# Altium PCB PanQHDMI.PcbDoc
Units mm, origin at the board's own origin, x right, y up, seen from the top; angles counter-clockwise.
Board outline 41.06 x 35.18 mm, 4 copper layers (Top Layer, Layer 1, Layer 2, Bottom Layer); 25 components, 46 nets, 206 pads, 77 vias.
Unrouted connection lines stored in the file: 2.
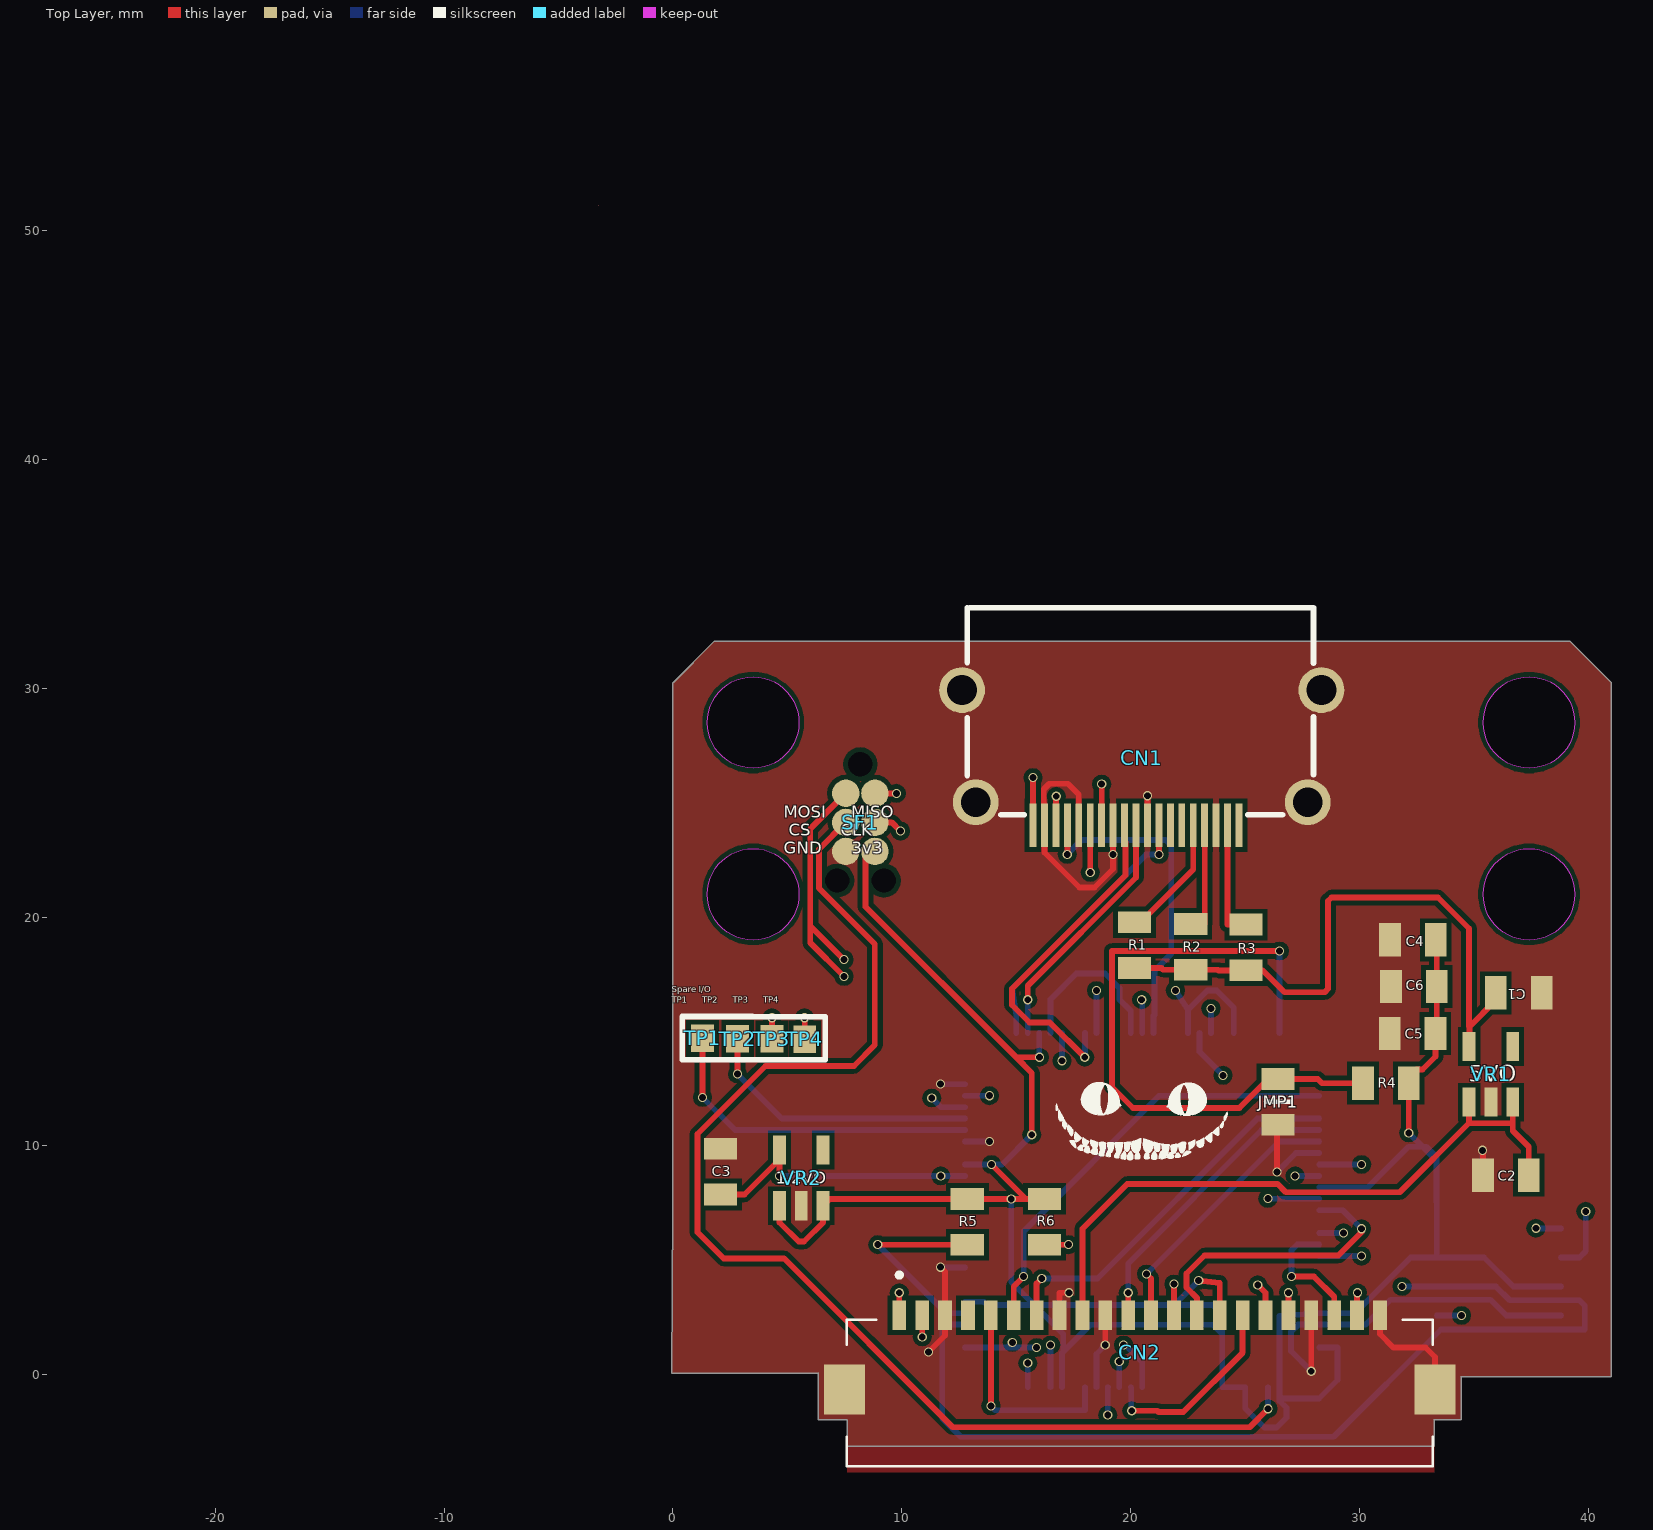
[diagram p0: Top Layer view]
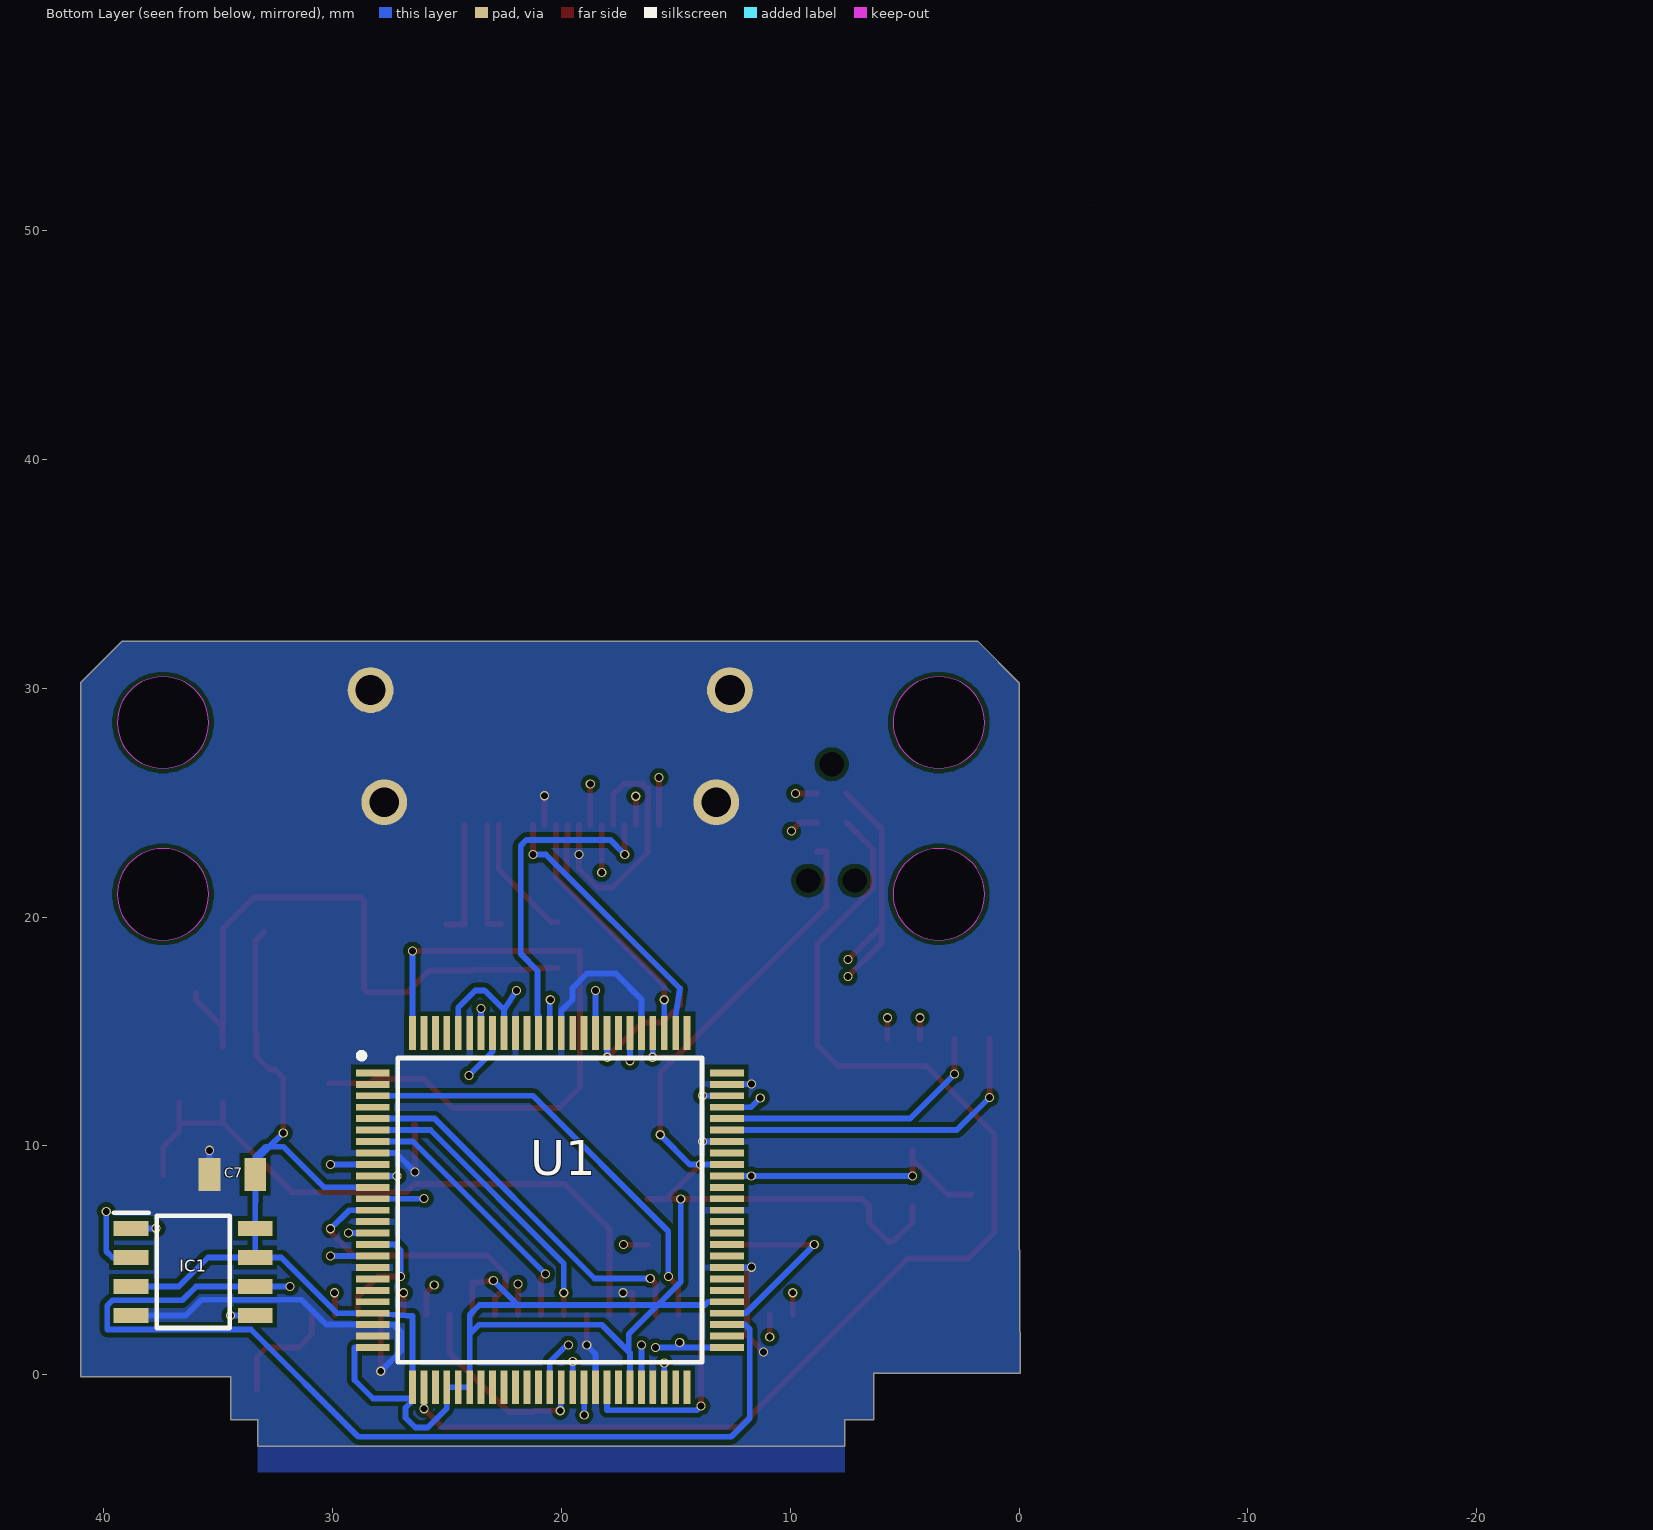
[diagram p1: Bottom Layer view, seen from below]
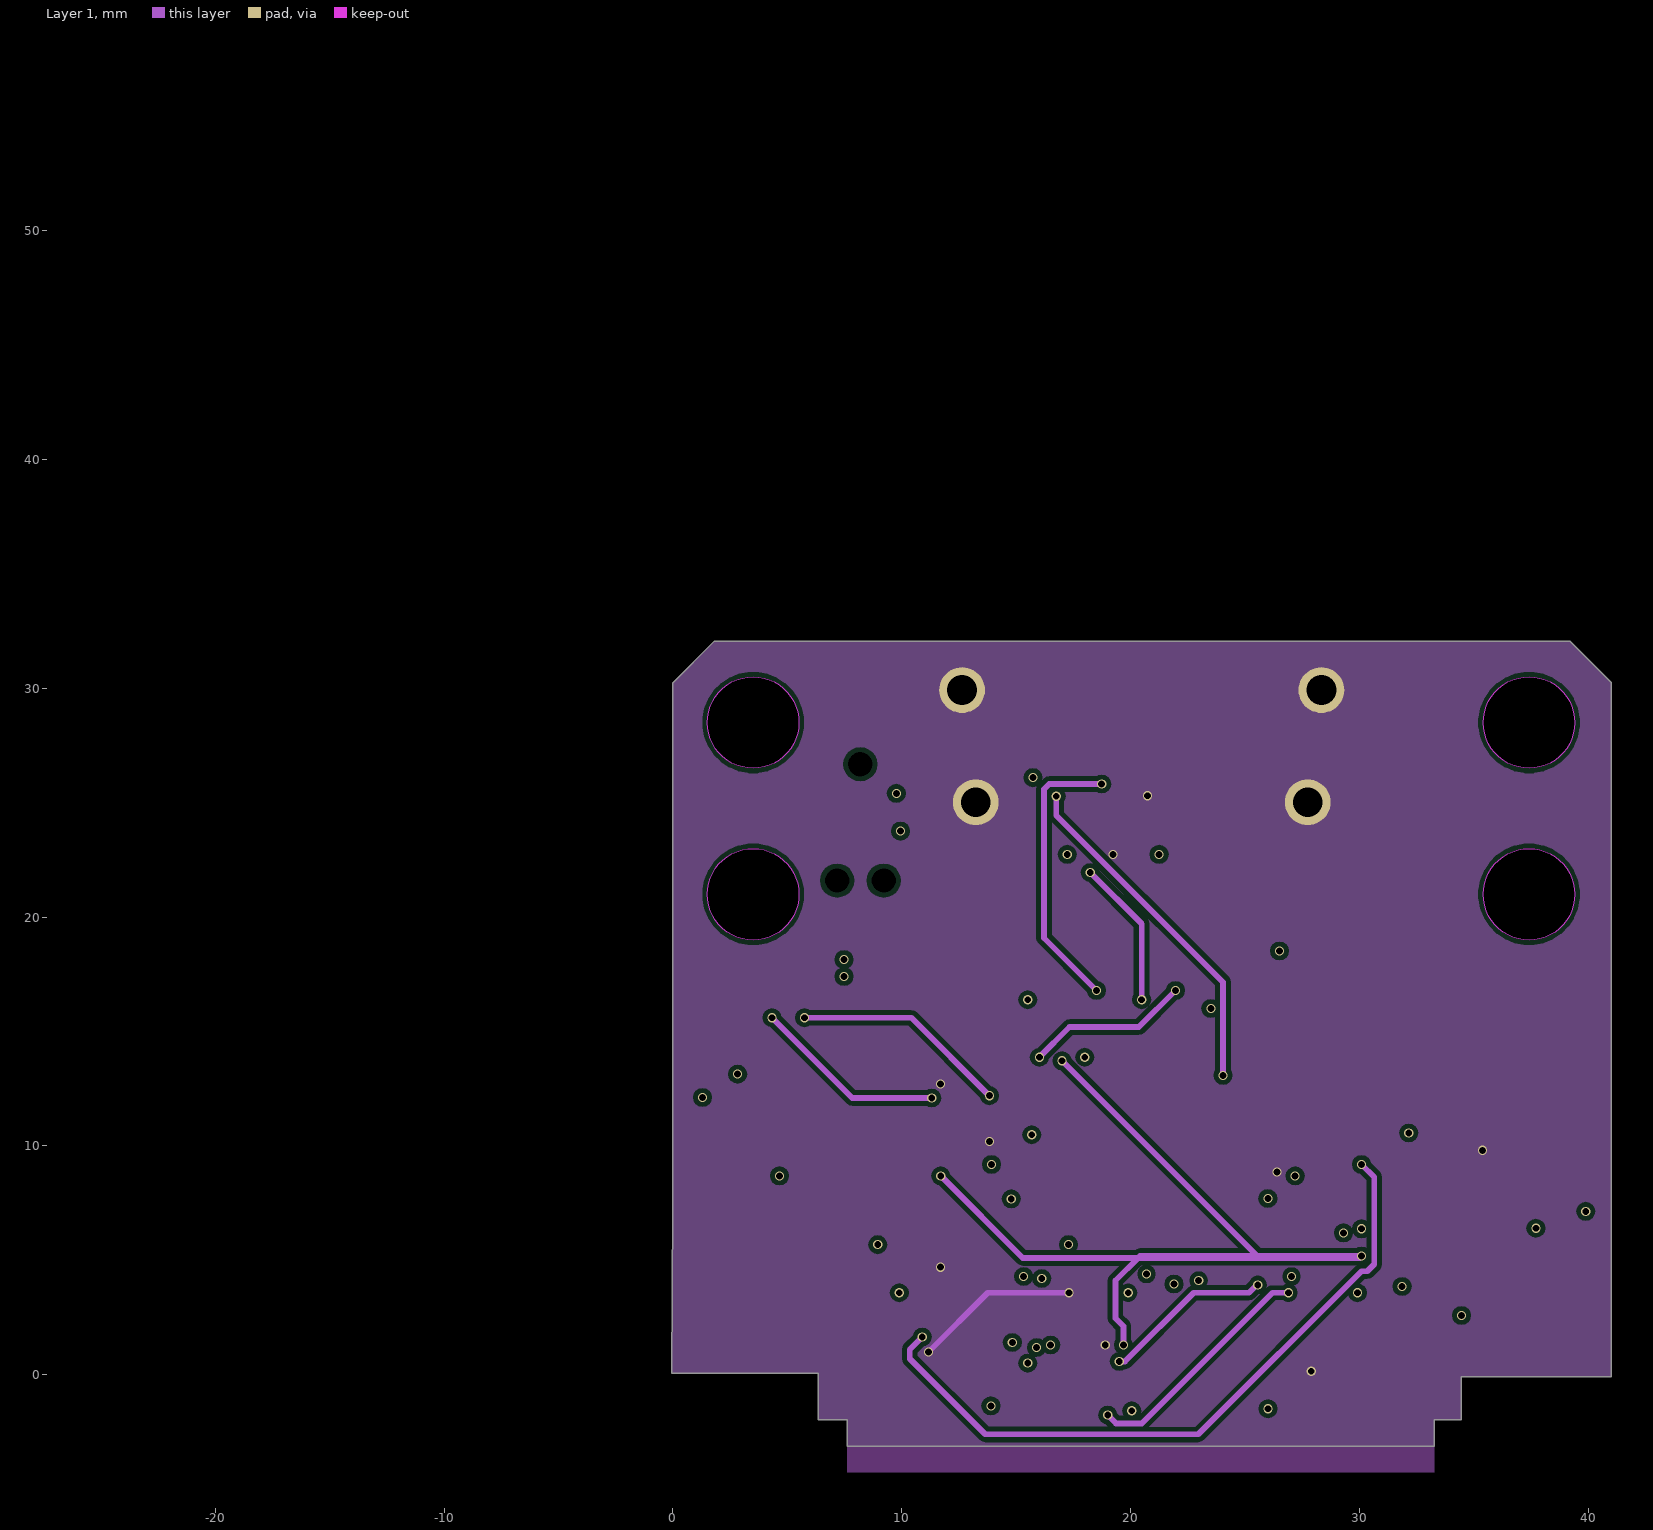
[diagram p2: Layer 1]
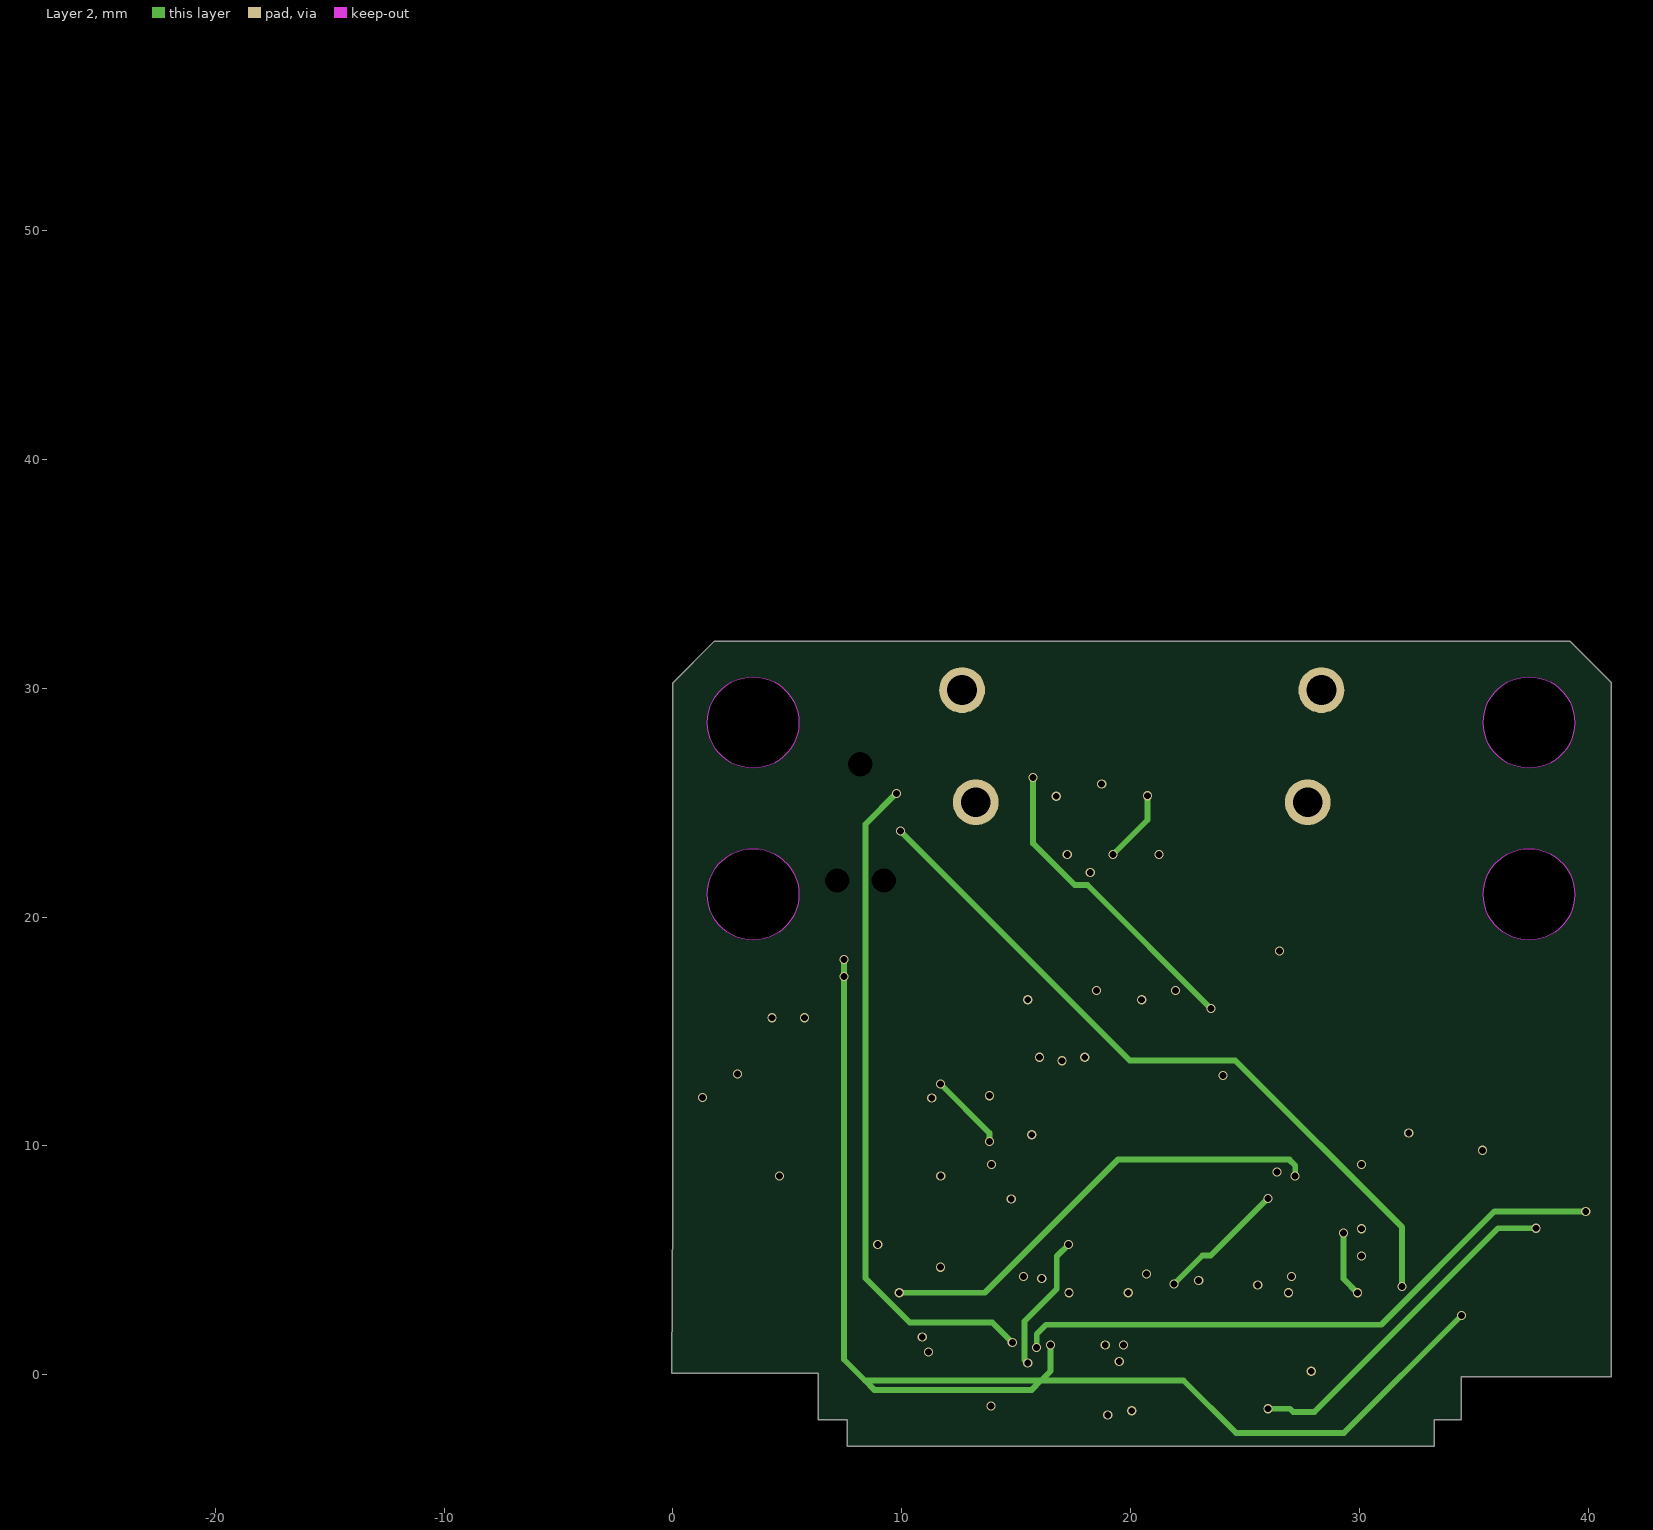
[diagram p3: Layer 2]
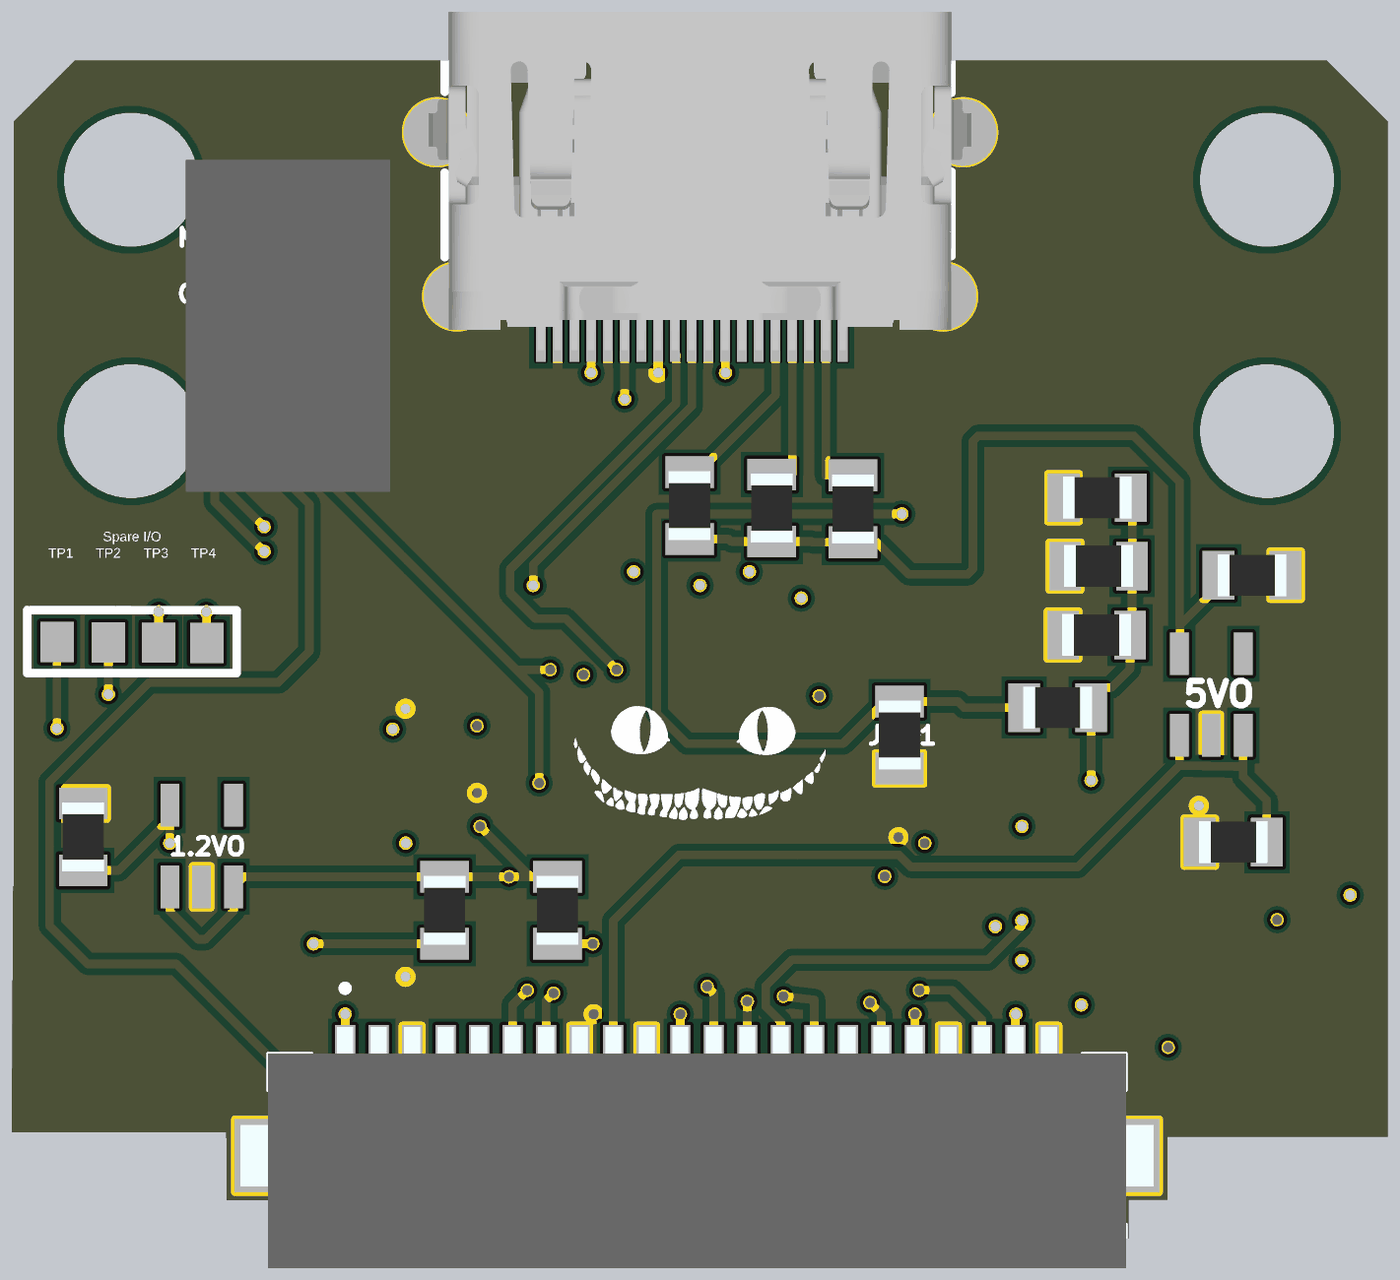
[diagram p4: 3D render of the assembled board from above, using the file's embedded part models]
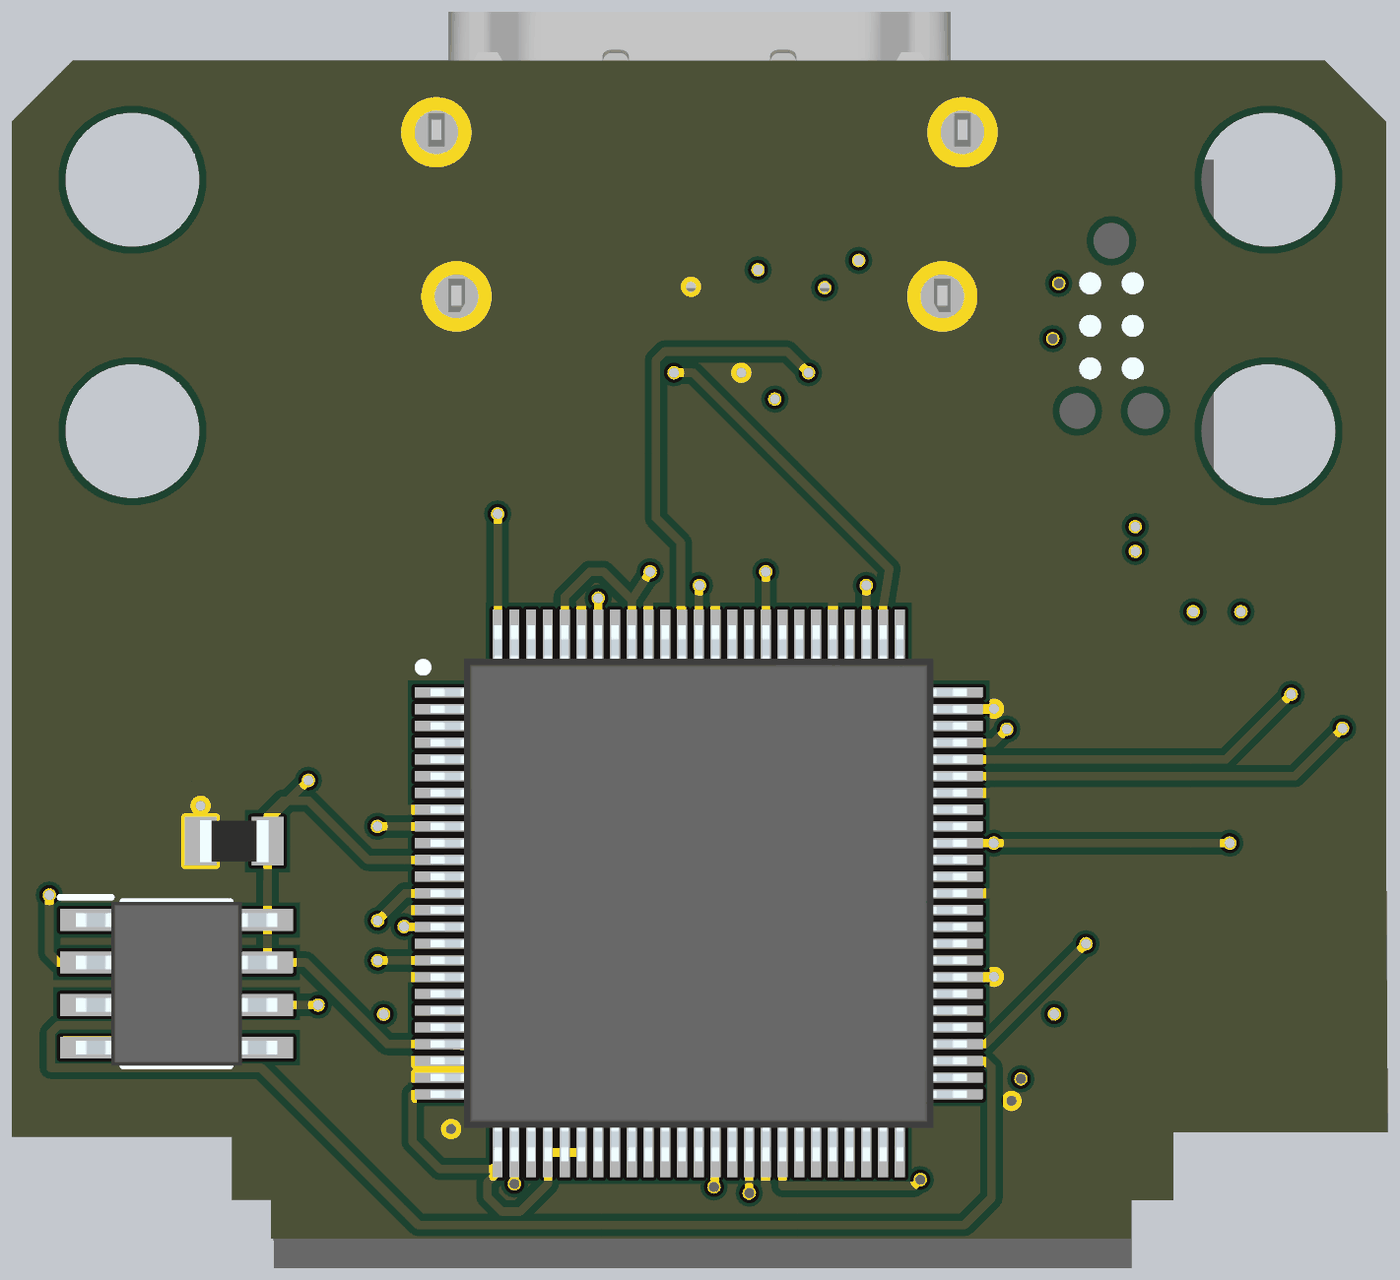
[diagram p5: 3D render of the assembled board from below, using the file's embedded part models]

## Layer stack, top to bottom
Top Solder: solder mask 0.0102, Solder Resist, Dk 3.5
Top Layer: signal copper 0.0356
Dielectric 2: prepreg 0.32, PP-006, Dk 4.1
Layer 1: signal copper 0.0356
Dielectric 1: dielectric 0.32, FR-4, Dk 4.8
Layer 2: signal copper 0.0356
Dielectric 3: prepreg 0.32, PP-006, Dk 4.1
Bottom Layer: signal copper 0.0356
Bottom Solder: solder mask 0.0102, Solder Resist, Dk 3.5

## Board outline
-0.06,0.06 -0.02,7.28 -0.02,30.22 1.82,32.06 39.18,32.06 41,30.24 41,-0.079 34.43,-0.079 34.43,-1.958 33.264,-1.958 33.264,-3.111 7.61,-3.111 7.605,-3.117 7.605,-1.968 6.342,-1.968 6.342,0.06
cut-out: 3.5,18.993 cw(c3.5,20.993) 1.5,20.993 cw(c3.5,20.993) 3.5,22.993 cw(c3.5,20.993) 5.5,20.993 cw(c3.5,20.993)
cut-out: 37.4,18.993 cw(c37.4,20.993) 35.4,20.993 cw(c37.4,20.993) 37.4,22.993 cw(c37.4,20.993) 39.4,20.993 cw(c37.4,20.993)
cut-out: 3.5,26.5 cw(c3.5,28.5) 1.5,28.5 cw(c3.5,28.5) 3.5,30.5 cw(c3.5,28.5) 5.5,28.5 cw(c3.5,28.5)
cut-out: 37.4,26.5 cw(c37.4,28.5) 35.4,28.5 cw(c37.4,28.5) 37.4,30.5 cw(c37.4,28.5) 39.4,28.5 cw(c37.4,28.5)

## Design rules (kind name [scope] priority, off if disabled: settings)
Clearance [All] p1: gap=0.203 ignorepadtopadclearanceinfootprint=FALSE except(0: Arc-Hole Track-Hole SMDPad-Hole THPad-Hole Via-Hole Fill-Hole Poly-Hole Region-Hole Text-Hole; 0.127: Arc-Arc Arc-Track Arc-SMDPad Arc-THPad Track-Track Track-SMDPad Track-THPad SMDPad-SMDPad SMDPad-THPad THPad-THPad)
MinimumSolderMaskSliver [All] p1: minsoldermaskwidth=0
PlaneConnect [All] p1: planeconnectstyle=Direct reliefexpansion=0.508 reliefentries=4 reliefconductorwidth=0.254 reliefairgap=0.254
PolygonConnect [All] p1: connectstyle=Direct reliefconductorwidth=0.254 reliefentries=4 polygonreliefangle="90 Angle" airgapwidth=0.254
RoomDefinition PanQHDMI [InComponentClass('PanQHDMI')] p1: confinementstyle=ConfineIn formatcopy=TRUE lockcomponents=FALSE outline 42.144,-2.459 64.036,-2.459 64.036,0.754 42.144,0.754
RoutingVias [All] p1: holewidth=0.3 width=0.4 viastyle="Through Hole" minholewidth=0.3 minwidth=0.4 maxholewidth=0.3 maxwidth=0.4
SilkToSolderMaskClearance [IsPad] p1: minsilkscreentomaskgap=0 clearancetoexposedcopper=TRUE
SolderMaskExpansion [All] p1: expansion=0.102 istentingtop=FALSE
Width [All] p1: maxlimit=0.889 minlimit=0.203 preferedwidth=0.254 minimp=50.000000 maximp=50.000000 favimp=50.000000
27 further rules are at their usual default settings.

## Components (designator, comment, footprint, x,y, rotation, side; value= is the part's Value field where it differs from the comment)
C1 "100nf" RESC2012X50N 36.951,16.69 r180 top
C2 "100nf" RESC2012X50N 36.391,8.722 r0 top
C3 "100nf" RESC2012X50N 2.073,8.88 r90 top
C4 "100nf" RESC2012X50N 32.329,19.007 r0 top
C5 "100nf" RESC2012X50N 32.311,14.907 r0 top
C6 "100nf" RESC2012X50N 32.37,16.965 r0 top
C7 "10nf" RESC2012X50N 34.364,8.753 r180 bottom
CN1 "10029449-111RLF" HDMI-SMD_10029449-001RLF 20.48,26.967 r180 top
CN2 "CONN1(FPC)" XF3M122151B 20.389,-0.691 r0 top
IC1 "AT25DF041B-SSHN-B" SOIC127P600X175-8N 36.081,4.496 r180 bottom
JMP1 "0R(SB)" RESC2012X50N 26.431,11.923 r270 top
R1 "10K" RESC2012X50N 20.168,18.771 r90 top
R2 "10K" RESC2012X50N 22.619,18.699 r90 top
R3 "180R" RESC2012X50N 25.042,18.672 r90 top
R4 "4.7K" RESC2012X50N 31.148,12.741 r0 top
R5 "330R" RESC2012X50N 12.857,6.688 r90 top
R6 "4.7K" RESC2012X50N 16.226,6.688 r270 top
SF1 "2.54-1x6P直针" TC2030MCP 7.551,25.408 r270 top
TP1 "Component_1" TP1 1.29,14.699 r90 top
TP2 "Component_1" TP1 2.824,14.684 r90 top
TP3 "Component_1" TP1 4.321,14.676 r90 top
TP4 "Component_1" TP1 5.758,14.668 r90 top
U1 "'" QFP50P1600X1600X120-100N 20.5,7.193 r180 bottom
VR1 "LP2980AIM5X-5.0/NOPB" MF05A_TEX 35.735,13.132 r90 top
VR2 "TLV70212DBVR" MF05A_TEX 5.608,8.608 r90 top

## Footprints (in the part's own frame and the unit in brackets; to place one, negate y for a bottom-side part, rotate by r counter-clockwise, add the part's x,y. Pads: shape width x height; smd on the part's side, far side on the other; paste and mask are expansions set on the pad)
HDMI-SMD_10029449-001RLF [mm]
  rect 0.3x1.9 smd paste-100 mask+0.05: 1(4.75,2.95) 2(4.25,2.95) 3(3.75,2.95) 4(3.25,2.95) 5(2.75,2.95) 6(2.25,2.95) 7(1.75,2.95) 8(1.25,2.95) 9(0.75,2.95) 10(0.25,2.95) 11(-0.25,2.95) 12(-0.75,2.95) 13(-1.25,2.95) 14(-1.75,2.95) 15(-2.25,2.95) 16(-2.75,2.95) 17(-3.25,2.95) 18(-3.75,2.95) 19(-4.25,2.95)
  round 2 hole 1.3 paste+0 mask+0.05: 20(-7.85,-2.95) 20(-7.25,1.95) 20(7.25,1.95) 20(7.85,-2.95)
  silkscreen extent -7.5,-6.55 7.62,2.5, body extent -8.1,-6.55 8.1,3.55, height 6.28
MF05A_TEX [mil]
  rect 50x22 smd: 1(-48,37.5) 2(-48,0) 3(-48,-37.5) 4(48,-37.5) 5(48,37.5)
QFP50P1600X1600X120-100N [mm]
  rect 1.475x0.3 smd: 1(-7.738,6) 2(-7.738,5.5) 3(-7.738,5) 4(-7.738,4.5) 5(-7.738,4) 6(-7.738,3.5) 7(-7.738,3) 8(-7.738,2.5) 9(-7.738,2) 10(-7.738,1.5) 11(-7.738,1) 12(-7.738,0.5) 13(-7.738,0) 14(-7.738,-0.5) 15(-7.738,-1) 16(-7.738,-1.5) 17(-7.738,-2) 18(-7.738,-2.5) 19(-7.738,-3) 20(-7.738,-3.5) 21(-7.738,-4) 22(-7.738,-4.5) 23(-7.738,-5) 24(-7.738,-5.5) 25(-7.738,-6) 51(7.738,-6) 52(7.738,-5.5) 53(7.738,-5) 54(7.738,-4.5) 55(7.738,-4) 56(7.738,-3.5) 57(7.738,-3) 58(7.738,-2.5) 59(7.738,-2) 60(7.738,-1.5) 61(7.738,-1) 62(7.738,-0.5) 63(7.738,0) 64(7.738,0.5) 65(7.738,1) 66(7.738,1.5) 67(7.738,2) 68(7.738,2.5) 69(7.738,3) 70(7.738,3.5) 71(7.738,4) 72(7.738,4.5) 73(7.738,5) 74(7.738,5.5) 75(7.738,6)
  rect 0.3x1.475 smd: 26(-6,-7.738) 27(-5.5,-7.738) 28(-5,-7.738) 29(-4.5,-7.738) 30(-4,-7.738) 31(-3.5,-7.738) 32(-3,-7.738) 33(-2.5,-7.738) 34(-2,-7.738) 35(-1.5,-7.738) 36(-1,-7.738) 37(-0.5,-7.738) 38(0,-7.738) 39(0.5,-7.738) 40(1,-7.738) 41(1.5,-7.738) 42(2,-7.738) 43(2.5,-7.738) 44(3,-7.738) 45(3.5,-7.738) 46(4,-7.738) 47(4.5,-7.738) 48(5,-7.738) 49(5.5,-7.738) 50(6,-7.738) 76(6,7.738) 77(5.5,7.738) 78(5,7.738) 79(4.5,7.738) 80(4,7.738) 81(3.5,7.738) 82(3,7.738) 83(2.5,7.738) 84(2,7.738) 85(1.5,7.738) 86(1,7.738) 87(0.5,7.738) 88(0,7.738) 89(-0.5,7.738) 90(-1,7.738) 91(-1.5,7.738) 92(-2,7.738) 93(-2.5,7.738) 94(-3,7.738) 95(-3.5,7.738) 96(-4,7.738) 97(-4.5,7.738) 98(-5,7.738) 99(-5.5,7.738) 100(-6,7.738)
  silkscreen extent -8.35,-6.65 6.65,6.87, body extent -8,-8 8,8, height 1.2
RESC2012X50N [mm]
  rect 0.95x1.45 smd: 1(-1,0) 2(1,0)
  body extent -1.02,-0.63 1.02,0.63, height 0.5
SOIC127P600X175-8N [mm]
  rect 1.525x0.65 smd: 1(-2.712,1.905) 2(-2.712,0.635) 3(-2.712,-0.635) 4(-2.712,-1.905) 5(2.712,-1.905) 6(2.712,-0.635) 7(2.712,0.635) 8(2.712,1.905)
  silkscreen extent -3.47,-2.45 1.6,2.58, body extent -3,-2.45 3,2.45, height 1.75
TC2030MCP [mm]
  round 1.2 smd: 1(0,0) 2(0,1.27) 3(1.27,0) 4(1.27,1.27) 5(2.54,0) 6(2.54,1.27)
  round 0.533 hole 1.067 unplated: MH1(-1.27,0.635) MH2(3.81,1.651) MH3(3.81,-0.381)
  body extent -3.68,-2.41 6.22,3.68, height 18.77
TP1 [mm]
  rect 1.2x1 smd: TP(0,0)
XF3M122151B [mm]
  rect 0.6x1.3 smd: 1(-10.5,3.3) 2(-9.5,3.3) 3(-8.5,3.3) 4(-7.5,3.3) 5(-6.5,3.3) 6(-5.5,3.3) 7(-4.5,3.3) 8(-3.5,3.3) 9(-2.5,3.3) 10(-1.5,3.3) 11(-0.5,3.3) 12(0.5,3.3) 13(1.5,3.3) 14(2.5,3.3) 15(3.5,3.3) 16(4.5,3.3) 17(5.5,3.3) 18(6.5,3.3) 19(7.5,3.3) 20(8.5,3.3) 21(9.5,3.3) 22(10.5,3.3)
  rect 1.8x2.2 smd: S1(-12.9,0.05) S2(12.9,0.05)
  silkscreen extent -12.8,-3.3 12.8,5.1, body extent -13.62,-3.3 13.62,3.89, height 2.1

## Part data
C1 C2 C3 C4 C5 C6 C7: library part 08055A150JAT2A, "Capacitor", Manufacturer_Name="Kyocera AVX", Mouser Part Number=581-08055A150J, Arrow Part Number=08055A150JAT2A, Arrow Price/Stock=https://www.arrow.com/en/products/08055a150jat2a/avx?region=nac, Datasheet Link=https://componentsearchengine.com/Datasheets/1/06031A100FAT2A.pdf, Height=0.94mm, Manufacturer_Part_Number=08055A150JAT2A, Mouser Price/Stock=https://www.mouser.co.uk/ProductDetail/AVX/08055A150JAT2A?qs=pZVDklL%2Fs8hiEua37sqbaA%3D%3D
CN1: JLCPCB Part Class="Extended Part", Manufacturer=Amphenol, Add into BOM=yes, Convert to PCB=yes, Datasheet=https://atta.szlcsc.com/upload/public/pdf/source/20190916/C428493_2220CBF119BDA60368E33A9DE2491E6D.pdf, Device=10029449-111RLF, LCSC Part Name=10029449-111RLF, Manufacturer Part=10029449-111RLF, Supplier=LCSC, Supplier Footprint=SMD, Supplier Part=C427307, Symbol=10029449-111RLF
CN2: library part 2-84953-2, "Conn FPC Connector SKT 22 POS 1mm Solder RA SMD Automotive T/R", Package=None, Availability=Unavailable, Check_prices=https://www.snapeda.com/parts/2-84953-2/TE%20Connectivity%20/%20AMP/view-part/580667/?ref=eda, EU_RoHS_Compliance=Compliant, MF="TE Connectivity / AMP", MP=2-84953-2, Price=None, SnapEDA_Link=https://www.snapeda.com/parts/2-84953-2/TE%20Connectivity%20/%20AMP/view-part/580667/?ref=snap
IC1: "Integrated Circuit", Manufacturer_Name="Renesas Electronics", Mouser Part Number=988-AT25DF041BSSHNB, Datasheet Link=https://www.renesas.com/us/en/products/memory-logic/non-volatile-memory/spi-nor-flash/dual-quad-spi-memory/at25df041b-4-mbit-165-v-36-v-range-spi-serial-flash-memory-dual-io-support, Height=1.75mm, Manufacturer_Part_Number=AT25DF041B-SSHN-B, Mouser Price/Stock=https://www.mouser.co.uk/ProductDetail/Renesas-Dialog/AT25DF041B-SSHN-B?qs=IS%252B4QmGtzzrzLjmp4oWaPw%3D%3D
JMP1 R1 R2 R3 R4 R5 R6: library part CPF0805B102RE1, "Resistor", Manufacturer_Name="TE Connectivity", Datasheet Link=http://docs-europe.electrocomponents.com/webdocs/13d1/0900766b813d116f.pdf, Height=0.65mm, Manufacturer_Part_Number=CPF0805B102RE1
SF1: Color=Black, Current Rating (Max)=3A, JLCPCB Part Class="Extended Part", LCSC Part Name="间距:2.54mm 1x6P 直插 方针", Manufacturer=BOOMELE(博穆精密), Operating Temperature Range=-40℃~+105℃, Voltage Rating (Max)=-, Add into BOM=yes, Circluar Pins/Square Pins="Square Pins", Contact Plating=-, Convert to PCB=yes, Device=2.54-1x6P直针, Insulation Height=-, Length of Mating Pin=-, Manufacturer Part=2.54-1x6P直针, Mounting Type=Straight, Number of Pins=6P, Number of Rows=Plugin, Pin Structure=1x6P, Pitch=2.54mm, Row Spacing=-, Supplier=LCSC, Supplier Footprint=插件,P=2.54mm, Supplier Part=C37208, Symbol=Header-Male-2.54_1x6
U1: library part XC3S200A-4VQG100C, "Integrated Circuit", Manufacturer_Name=AMD, Mouser Part Number=217-C3S200A-4VQG100C, Datasheet Link=http://www.xilinx.com/support/documentation/data_sheets/ds529.pdf, Height=1.2mm, Manufacturer_Part_Number=XC3S200A-4VQG100C, Mouser Price/Stock=https://www.mouser.co.uk/ProductDetail/Xilinx/XC3S200A-4VQG100C?qs=rrS6PyfT74eGc8DZ2cmrnA%3D%3D
VR1: MFR_NAME="Texas Instruments", Package=MF05A_TEX, COPYRIGHT="Copyright (C) 2024 Ultra Librarian. All rights reserved.", DeviceSetName=LP2980AIM5X-5.0/NOPB, DIGIKEY_PART_NUMBER_1=LP2980AIM5X-5.0/NOPBCT-ND, DIGIKEY_PART_NUMBER_2=LP2980AIM5X-5.0/NOPBDKR-ND, DIGIKEY_PART_NUMBER_3=LP2980AIM5X-5.0/NOPBTR-ND, DIGIKEY_PART_NUMBER_4=2156-LP2980AIM5X-5.0/NOPB-ND, DIGIKEY_PART_NUMBER_5=2156-LP2980AIM5X-5.0/NOPB-TI-ND, GateName_1=A, LibraryName=5Vout, Manufacturer_Part_Number=LP2980AIM5X-5.0/NOPB, SymbolName_1=LP2980AIM5-5.0
VR2: ki_fp_filters="DBV0005A_N DBV0005A_M DBV0005A_L", ki_keywords=TLV70212DBVR, Supplier=TLV70212DBVR

## Via types
v1: diameter 0.4, hole 0.3, Top Layer to Bottom Layer, 77 vias

## Nets (pads, with @x,y where several pads share a name; then routed paths per layer and width w, separated by ;. In a path a pad name is that pad's centre, name@x,y a point inside that pad or via, vN(x,y) a via of type N, cw(c..) or ccw(c..) an arc to the next point about the centre after c; other vN are vias at no path point)
1V2: C3.1 U1.17 U1.38 U1.66 U1.81 VR2.5 | length 63.9
  Top Layer w0.254: C3.1 3.125,7.88 VR2.5@4.656,9.411 ; v1(4.656,8.693) VR2.5@4.656,9.411 ; VR2.5 VR2.5@4.656,9.411
  Layer 1 w0.254: v1(11.698,8.693) 15.281,5.111 20.325,5.111 ; v1(17,13.72) 25.534,5.187 ; v1(19.688,1.307) 19.688,2.12 19.335,2.473 19.335,4.12 20.325,5.111 ; 20.325,5.111 30.003,5.111 v1(30.079,5.187) 25.534,5.187 ; 20.325,5.111 20.402,5.187 25.534,5.187
  Bottom Layer w0.254: v1(4.656,8.693) v1(11.698,8.693) U1.66 ; v1(17,13.72) U1.81 ; v1(19.688,1.307) 19.757,1.307 20.5,0.564 U1.38 ; U1.17 30.072,5.193 v1(30.079,5.187)
3V3: C4.2 C5.2 C6.2 C7.2 CN2.15 IC1.3 IC1.7 IC1.8 R4.2 R5.2 R6.1 SF1.6 U1.11 U1.22 U1.25 U1.26 U1.29 U1.30 U1.31 U1.45 U1.55 U1.67 U1.79 U1.92 U1.96 VR2.1 VR2.3 | length 135.1
  Top Layer w0.254: VR2.1 4.656,6.66 5.494,5.822 5.723,5.822 6.561,6.66 VR2.3 6.86,7.688 R5.2 v1(14.778,7.688) 15.423,7.688 ; SF1.6 8.413,22.868 8.413,20.455 14.994,13.874 ; v1(13.918,9.193) 15.423,7.688 ; v1(15.677,10.489) 15.677,13.191 14.994,13.874 ; v1(16.007,13.874) 14.994,13.874 ; R6.1 15.423,7.688 ; v1(22.968,4.12) 23.889,4.012 CN2.15 ; v1(32.148,10.568) R4.2 32.148,12.991 32.496,13.339 32.746,13.339 33.311,13.904 C5.2 33.37,14.966 C6.2 ; C4.2@32.981,19.355 33.371,18.965 C6.2
  Layer 1 w0.254: v1(16.007,13.874) 17.328,15.194 20.351,15.194 v1(21.951,16.795)
  Bottom Layer w0.254: U1.55 13.581,3.193 13.721,3.053 15.779,3.053 ; U1.67 v1(13.918,9.193) 14.382,9.193 v1(15.677,10.489) ; v1(14.778,7.688) 14.778,4.054 15.779,3.053 ; U1.79 16,13.881 v1(16.007,13.874) ; U1.45 17,0.962 17.049,1.011 ; v1(21.951,16.795) 22.5,15.947 ; U1.92 22.5,15.947 ; v1(22.968,4.12) 21.901,3.053 ; U1.96 24.5,16.049 23.754,16.795 23.348,16.795 22.5,15.947 ; U1.25 29.038,1.193 29.038,-0.223 28.225,-1.036 26.653,-1.036 U1.26@26.5,-0.884 ; U1.11 30.368,8.193 32.136,9.962 32.754,9.962 ; v1(32.148,10.568) 32.754,9.962 ; IC1.3 36.708,3.861 35.438,5.131 IC1.7 ; 15.779,3.053 17.049,1.783 17.049,1.011 ; 15.779,3.053 21.901,3.053 ; 17.049,1.011 18.228,2.19 23.594,2.19 24,1.783 ; 21.901,3.053 23.569,3.053 24,2.621 24,1.783 ; 24,1.783 U1.31 U1.30 U1.29 25,-1.468 25.839,-2.306 26.371,-2.306 26.802,-1.874 26.802,-1.44 26.5,-1.138 U1.26@26.5,-0.884 ; U1.26@26.5,-0.884 U1.26 26.5,2.569 U1.22 29.795,2.693 32.233,5.131 IC1.7 ; 32.754,9.962 32.906,9.962 33.364,9.505 C7.2@33.364,9.352 ; 32.754,9.962 C7.2@33.364,9.352 ; C7.2@33.364,9.352 C7.2 33.364,7.554 33.369,7.549 IC1.8 IC1.7
5V: C1.2 R1.1 R2.1 R3.1 VR1.5 | length 26.7
  Top Layer w0.254: R1.1 21.341,17.771 21.413,17.699 R2.1 23.805,17.699 23.833,17.672 R3.1 25.761,17.672 26.714,16.718 28.472,16.718 28.621,16.867 28.621,20.706 28.77,20.855 33.425,20.855 34.783,19.497 34.783,15.218 ; VR1.5 34.783,14.488 34.807,14.512 34.807,15.218 35.951,16.363 C1.2
12V: C2.2 CN2.9 VR1.1 VR1.3 | length 29.2
  Top Layer w0.254: CN2.9 17.889,6.381 19.848,8.34 26.418,8.34 26.777,7.981 31.755,7.981 34.783,11.008 ; VR1.1 34.783,11.008 ; VR1.3 36.688,10.978 ; C2.2 37.391,9.962 36.688,10.665 36.688,10.978 ; 34.783,11.008 36.688,10.978
27MHZ: CN2.4
54MHZ: CN2.5 U1.43 | length 9.2
  Top Layer w0.254: v1(13.889,-1.356) CN2.5
  Bottom Layer w0.254: v1(13.889,-1.356) 14.077,-1.544 18,-1.544 U1.43
ACLK: CN2.18 U1.41 | length 12.6
  Top Layer w0.254: CN2.18 v1(26.889,3.587)
  Layer 1 w0.254: v1(18.994,-1.755) 19.362,-2.123 20.48,-2.123 26.19,3.587 v1(26.889,3.587)
  Bottom Layer w0.254: v1(18.994,-1.755) 18.997,-1.752 18.997,-0.548 U1.41
AID: CN2.17 U1.40 | length 10
  Top Layer w0.254: v1(25.548,3.93) 25.889,3.59 CN2.17
  Layer 1 w0.254: v1(19.5,0.589) 19.752,0.589 22.752,3.59 25.168,3.59 25.508,3.93 v1(25.548,3.93)
  Bottom Layer w0.254: U1.40 v1(19.5,0.589)
ALR: CN2.16 U1.39 | length 8.6
  Top Layer w0.254: v1(20.045,-1.571) 21.166,-1.571 21.216,-1.62 22.298,-1.62 24.889,0.97 CN2.16
  Bottom Layer w0.254: U1.39 20.023,-0.567 20.023,-1.548 v1(20.045,-1.571)
CLK: IC1.6 SF1.4 U1.53 | length 77.6
  Top Layer w0.254: SF1.4 9.553,24.138 v1(9.937,23.754)
  Layer 2 w0.254: v1(9.937,23.754) 19.958,13.733 24.567,13.733 31.857,6.444 v1(31.857,3.861)
  Bottom Layer w0.254: U1.53 11.969,2.193 11.766,1.99 11.766,-1.9 12.573,-2.708 28.865,-2.708 33.559,1.986 39.833,1.986 39.833,3.028 39.604,3.256 36.556,3.256 35.952,3.861 IC1.6 v1(31.857,3.861)
CS: IC1.1 SF1.3 U1.27 | length 70.8
  Top Layer w0.254: SF1.3 6.381,22.967 6.381,21.265 8.819,18.827 8.819,14.407 7.905,13.493 4.044,13.493 1.072,10.521 1.072,6.228 2.215,5.085 4.857,5.085 12.227,-2.285 25.197,-2.285 v1(26,-1.482)
  Layer 2 w0.254: v1(26,-1.482) 26.962,-1.482 27.1,-1.62 28.022,-1.62 36.048,6.406 v1(37.699,6.406)
  Bottom Layer w0.254: v1(26,-1.482) U1.27@26,-0.545 ; v1(37.699,6.406) 37.704,6.401 IC1.1
CSEL: CN2.7 U1.5 | length 16.7
  Top Layer w0.254: CN2.7 15.889,3.993 v1(16.109,4.213)
  Bottom Layer w0.254: v1(16.109,4.213) 18.547,4.213 25.527,11.193 U1.5
D0: CN2.11 U1.6 | length 13
  Top Layer w0.254: CN2.11 v1(19.889,3.587)
  Bottom Layer w0.254: v1(19.889,3.587) 19.889,4.865 25.717,10.693 U1.6
D1: CN2.12 U1.7 | length 11.8
  Top Layer w0.254: v1(20.691,4.41) 20.889,4.213 CN2.12
  Bottom Layer w0.254: v1(20.691,4.41) 26.475,10.193 U1.7
D2: CN2.2 U1.9 | length 33.3
  Top Layer w0.254: v1(10.889,1.656) CN2.2
  Layer 1 w0.254: v1(10.889,1.656) 10.343,1.111 10.343,0.704 13.646,-2.598 22.954,-2.598 30.079,4.526 30.333,4.526 30.638,4.831 30.638,8.641 v1(30.086,9.193)
  Bottom Layer w0.254: U1.9 v1(30.086,9.193)
D3: CN2.1 U1.10 | length 22.3
  Top Layer w0.254: CN2.1 v1(9.889,3.589)
  Layer 2 w0.254: v1(9.889,3.589) 13.622,3.589 19.436,9.403 26.929,9.403 27.183,9.149 v1(27.183,8.692)
  Bottom Layer w0.254: v1(27.183,8.692) v1(27.183,8.692) U1.10
D4: CN2.13 U1.12 | length 9.3
  Top Layer w0.254: CN2.13 v1(21.889,3.968)
  Layer 2 w0.254: v1(21.889,3.968) 23.131,5.21 23.498,5.21 v1(25.99,7.701)
  Bottom Layer w0.254: v1(25.99,7.701) 25.998,7.693 U1.12
D5: CN2.14 U1.13 | length 12.7
  Top Layer w0.254: CN2.14 22.889,3.364 22.438,3.815 22.438,4.425 23.225,5.212 29.063,5.212 30.079,6.228 v1(30.079,6.381)
  Bottom Layer w0.254: U1.13 29.266,7.193 v1(30.079,6.381)
D6: CN2.21 U1.15 | length 4.9
  Top Layer w0.254: CN2.21 29.889,3.574 v1(29.901,3.587)
  Layer 2 w0.254: v1(29.292,6.203) 29.292,4.196 v1(29.901,3.587)
  Bottom Layer w0.254: U1.15 29.282,6.193 v1(29.292,6.203)
D7: CN2.20 U1.16 | length 5.5
  Top Layer w0.254: v1(27.025,4.298) 28,4.298 28.889,3.409 CN2.20
  Bottom Layer w0.254: v1(27.025,4.298) 27.025,5.441 27.277,5.693 U1.16
GND: C1.1 C2.1 C3.2 C4.1 C5.1 C6.1 C7.1 CN1.2 CN1.5 CN1.8 CN1.11 CN1.17 CN1.20 CN2.3 CN2.8 CN2.10 CN2.19 CN2.22 CN2.S1 CN2.S2 IC1.4 JMP1.2 SF1.5 U1.8 U1.14 U1.18 U1.23 U1.24 U1.42 U1.47 U1.58 U1.63 U1.69 U1.74 U1.80 U1.87 U1.91 U1.95 VR1.2 VR2.2 | length 75
  Top Layer w0.254: v1(11.168,0.998) 11.889,1.719 CN2.3 11.889,4.505 v1(11.689,4.704) ; CN2.8 16.889,3.579 16.896,3.587 v1(17.303,3.587) ; CN1.5 17.73,25.354 17.26,25.825 16.439,25.825 16.2,25.585 16.2,24.953 16.23,24.923 CN1.2 16.23,22.817 17.757,21.29 18.417,21.29 19.23,22.103 v1(19.23,22.738) CN1.8 ; v1(18.889,1.301) CN2.10 ; CN1.11 20.73,25.302 v1(20.732,25.304) ; v1(26.396,8.87) 26.396,10.923 JMP1.2 ; v1(27.889,0.158) CN2.19 ; CN2.22 30.889,1.783 31.473,1.199 32.873,1.199 33.289,0.783 CN2.S2 ; v1(35.364,9.81) 35.391,9.783 C2.1
  Layer 1 w0.254: v1(11.168,0.998) 13.756,3.587 v1(17.303,3.587)
  Layer 2 w0.254: v1(11.689,12.705) 13.823,10.572 v1(13.823,10.191) ; v1(19.23,22.738) 20.732,24.24 v1(20.732,25.304)
  Bottom Layer w0.254: v1(11.689,4.704) 11.7,4.693 U1.58 ; v1(11.689,12.705) 11.701,12.693 U1.74 ; U1.69 13.82,10.193 v1(13.823,10.191) ; U1.80 16.5,16.414 17.618,17.531 18.878,17.531 19.513,16.896 19.513,16.393 20,15.906 U1.87 ; U1.42 18.5,0.912 v1(18.889,1.301) ; v1(26.396,8.87) 27.219,9.693 U1.8 ; v1(27.889,0.158) 27.006,1.041 27.006,1.885 27.314,2.193 U1.23 30.257,2.193 31.345,3.282 35.718,3.282 36.409,2.591 IC1.4 ; C7.1 v1(35.364,9.81)
MISO: IC1.2 SF1.2 U1.51 | length 63.4
  Top Layer w0.254: SF1.2 8.824,25.405 v1(9.759,25.405)
  Layer 2 w0.254: v1(9.759,25.405) 8.413,24.059 8.413,4.222 10.343,2.291 13.95,2.291 v1(14.826,1.415) ; v1(15.89,1.193) 15.89,1.783 16.296,2.19 30.943,2.19 35.896,7.143 v1(39.878,7.143)
  Bottom Layer w0.254: U1.51 14.605,1.193 ; v1(14.826,1.415) 14.605,1.193 ; v1(15.89,1.193) 14.605,1.193 ; IC1.2 39.604,5.131 39.878,5.405 v1(39.878,7.143)
MOSI: IC1.5 SF1.1 U1.46 | length 71.9
  Top Layer w0.254: v1(7.473,17.404) 6,18.877 6,19.614 ; v1(7.473,18.141) 6,19.614 ; SF1.1 6,23.856 6,19.614
  Layer 2 w0.254: v1(7.473,18.141) v1(7.473,17.404) 7.473,0.666 8.387,-0.249 ; v1(16.5,1.307) 16.5,0.168 16.084,-0.249 ; v1(34.448,2.596) 29.317,-2.535 24.596,-2.535 22.31,-0.249 16.084,-0.249 ; 8.387,-0.249 16.084,-0.249 ; 8.387,-0.249 8.794,-0.655 15.677,-0.655 16.084,-0.249
  Bottom Layer w0.254: U1.46 v1(16.5,1.307) ; IC1.5 34.443,2.591 v1(34.448,2.596)
NetCN1_15: CN1.15 R1.2 | length 5.5
  Top Layer w0.254: R1.2 20.427,19.771 22.73,22.074 CN1.15
NetCN1_16: CN1.16 R2.2 | length 4.9
  Top Layer w0.254: R2.2 23.23,19.699 CN1.16
NetCN1_18: CN1.18 R3.2 | length 5.2
  Top Layer w0.254: CN1.18 24.23,19.672 R3.2
NetJMP1_1: JMP1.1 R4.1 U1.100 | length 28.8
  Top Layer w0.254: v1(26.5,18.522) 19.182,18.522 19.182,12.578 20.097,11.664 24.745,11.664 26.004,12.923 JMP1.1 28.174,12.923 28.356,12.741 R4.1
  Bottom Layer w0.254: U1.100 v1(26.5,18.522)
NetR5_1: R5.1 U1.54 | length 9
  Top Layer w0.254: v1(8.946,5.688) R5.1
  Bottom Layer w0.254: v1(8.946,5.688) 11.941,2.693 U1.54
NetR6_2: R6.2 U1.48 | length 8.1
  Top Layer w0.254: R6.2 v1(17.277,5.688)
  Layer 2 w0.254: v1(15.5,0.513) 15.359,0.654 15.359,2.342 16.769,3.752 16.769,5.18 v1(17.277,5.688)
  Bottom Layer w0.254: U1.48 v1(15.5,0.513)
TCK: U1.76
TDI: U1.2
TDMSData2+: CN1.1 U1.94 | length 16.8
  Top Layer w0.254: v1(15.728,26.091) 15.73,26.089 CN1.1
  Layer 2 w0.254: v1(15.728,26.091) 15.728,23.221 17.552,21.397 18.11,21.397 v1(23.5,16.007)
  Bottom Layer w0.254: U1.94 v1(23.5,16.007)
TDMSData2-: CN1.3 U1.93 | length 18.8
  Top Layer w0.254: CN1.3 16.73,25.264 v1(16.744,25.278)
  Layer 1 w0.254: v1(16.744,25.278) 16.744,24.44 24.034,17.15 v1(24.034,13.086)
  Bottom Layer w0.254: U1.93 23,14.12 v1(24.034,13.086)
TDO: U1.75
TMDSClock+: CN1.10 U1.78 | length 11
  Top Layer w0.254: v1(15.5,16.388) 15.5,17.003 20.23,21.733 CN1.10
  Bottom Layer w0.254: U1.78 v1(15.5,16.388)
TMDSClock-: CN1.12 U1.77 | length 12.1
  Top Layer w0.254: CN1.12 21.23,22.748 v1(21.24,22.738)
  Bottom Layer w0.254: U1.77 15,15.728 14.814,16.88 20.672,22.738 v1(21.24,22.738)
TMDSData0+: CN1.7 U1.84 | length 16
  Top Layer w0.254: CN1.7 v1(18.73,25.812)
  Layer 1 w0.254: v1(18.5,16.795) 16.211,19.084 16.211,25.583 16.439,25.812 v1(18.73,25.812)
  Bottom Layer w0.254: U1.84 v1(18.5,16.795)
TMDSData0-: CN1.9 U1.83 | length 15.1
  Top Layer w0.254: v1(17.989,13.874) 16.465,15.398 15.576,15.398 14.814,16.16 14.814,16.871 19.767,21.824 19.767,23.272 19.73,23.272 CN1.9
  Bottom Layer w0.254: v1(17.989,13.874) 18,13.885 U1.83
TMDSData1+: CN1.4 U1.89 | length 14.7
  Top Layer w0.254: v1(17.227,22.738) 17.23,22.742 CN1.4
  Bottom Layer w0.254: v1(17.227,22.738) 17.862,23.373 21.519,23.373 21.773,23.119 21.773,18.395 21.037,17.658 21.037,15.728 21,15.692 U1.89
TMDSData1-: CN1.6 U1.88 | length 10
  Top Layer w0.254: v1(18.23,21.951) CN1.6
  Layer 1 w0.254: v1(18.23,21.951) 20.478,19.703 v1(20.478,16.388)
  Bottom Layer w0.254: v1(20.478,16.388) 20.5,16.366 U1.88
TMS: U1.1
TP1: TP1.TP U1.70 | length 14.6
  Top Layer w0.254: v1(1.29,12.121) TP1.TP
  Bottom Layer w0.254: v1(1.29,12.121) 2.718,10.693 U1.70
TP2: TP2.TP U1.71 | length 12.3
  Top Layer w0.254: v1(2.824,13.137) TP2.TP
  Bottom Layer w0.254: v1(2.824,13.137) 4.768,11.193 U1.71
TP3: TP3.TP U1.72 | length 11
  Top Layer w0.254: TP3.TP 4.323,14.676 v1(4.323,15.601)
  Layer 1 w0.254: v1(4.323,15.601) 7.829,12.096 v1(11.308,12.096)
  Bottom Layer w0.254: v1(11.308,12.096) 11.711,11.693 U1.72
TP4: TP4.TP U1.73 | length 11.5
  Top Layer w0.254: v1(5.746,15.601) 5.758,15.588 TP4.TP
  Layer 1 w0.254: v1(5.746,15.601) 10.419,15.601 v1(13.823,12.197)
  Bottom Layer w0.254: U1.73 13.819,12.193 v1(13.823,12.197)
VSEL0: CN2.6 U1.3 | length 19.2
  Top Layer w0.254: CN2.6 14.889,3.865 v1(15.322,4.298)
  Bottom Layer w0.254: v1(15.322,4.298) 15.322,6.279 21.236,12.193 U1.3
pads on no net: CN1.13 CN1.14 CN1.19 SF1.MH1 SF1.MH2 SF1.MH3 U1.4 U1.19 U1.20 U1.21 U1.28 U1.32 U1.33 U1.34 U1.35 U1.36 U1.37 U1.44 U1.49 U1.50 U1.52 U1.56 U1.57 U1.59 U1.60 U1.61 U1.62 U1.64 U1.65 U1.68 U1.82 U1.85 U1.86 U1.90 U1.97 U1.98 U1.99 VR1.4 VR2.4

## Polygon pours and split planes (outlines as drawn)
GND on Layer 1 "BOT_GND" (solid, pour order 29): -0.06,0.06 -0.02,7.28 -0.02,30.22 1.82,32.06 39.18,32.06 41,30.24 41,-0.079 34.43,-0.079 34.43,-1.958 33.264,-1.958 33.264,-4.265 7.605,-4.265 7.605,-1.968 6.342,-1.968 6.342,0.06
GND on Bottom Layer "BOT_GND" (solid, pour order 30): -0.06,0.06 -0.02,7.28 -0.02,30.22 1.82,32.06 39.18,32.06 41,30.24 41,-0.079 34.43,-0.079 34.43,-1.958 33.264,-1.958 33.264,-4.265 7.605,-4.265 7.605,-1.968 6.342,-1.968 6.342,0.06
GND on Top Layer "TOP_GND" (solid, pour order 28): -0.06,0.06 -0.02,7.28 -0.02,30.22 1.82,32.06 39.18,32.06 41,30.24 41,-0.079 34.43,-0.079 34.43,-1.958 33.264,-1.958 33.264,-4.265 7.605,-4.265 7.605,-1.968 6.342,-1.968 6.342,0.06

## Other copper
Top Layer:
  region: -25.881,52.837 -25.881,52.85 -25.868,52.85 -25.868,52.837
  region: -3.251,51.087 -3.251,51.1 -3.238,51.1 -3.238,51.087
  region: 5.201,57.494 5.188,57.494 5.188,57.507 5.201,57.507

## Silkscreen, mask and mechanical layers (free items; w line width, h text height)
Top Overlay:
  drawing of 43 lines, arcs and shapes, not listed
  text "MOSI     MISO /  CS      CLK / GND      3v3" at 4.844,22.766 h0.52
  text "Spare I/O / TP1      TP2      TP3      TP4" at -0.062,16.144 h0.46
  text "5VO" at 34.762,12.799 h0.72
  text "1.2VO" at 4.488,8.339 h0.52
Mechanical 1:
  lines w0.2: -0.06,0.06 5.921,0.06 6.342,0.06 6.342,-1.079 6.342,-1.968 7.605,-1.968 7.605,-3.117 7.61,-3.111 33.264,-3.111 33.264,-1.958 34.43,-1.958 34.43,-0.079 41,-0.079 41,30.24 39.18,32.06 1.82,32.06 -0.02,30.22 -0.02,7.28 -0.06,0.06 ; 1.487,20.925 ccw(c3.487,20.925) 3.487,18.925 ccw(c3.487,20.925) 5.487,20.925 ccw(c3.487,20.925) 3.487,22.925 ccw(c3.487,20.925) 1.487,20.925 ; 1.512,28.543 cw(c3.512,28.543) 3.512,30.543 cw(c3.512,28.543) 5.512,28.543 cw(c3.512,28.543) 3.512,26.543 cw(c3.512,28.543) 1.512,28.543 ; 35.4,21 ccw(c37.4,21) 37.4,19 ccw(c37.4,21) 39.4,21 ccw(c37.4,21) 37.4,23 ccw(c37.4,21) 35.4,21 ; 35.4,28.404 cw(c37.4,28.404) 37.4,30.404 cw(c37.4,28.404) 39.4,28.404 cw(c37.4,28.404) 37.4,26.404 cw(c37.4,28.404) 35.4,28.404

## Text inside footprints (layer, text, board x,y; h text height)
VR1: Mechanical 3 "*" at 35.278,11.963 h1.97 r90; Mechanical 18 "0.022in/0.559mm" at 40.282,7.874 h0.98 r90; Mechanical 18 "0.038in/0.952mm" at 35.583,0.787 h0.98 r90; Mechanical 18 "0.118in/2.997mm" at 36.04,17.018 h0.98 r90; Mechanical 18 "0.118in/2.997mm" at 29.919,9.093 h0.98 r90; Mechanical 18 "0.066in/1.676mm" at 31.824,9.093 h0.98 r90; Mechanical 18 "Alt 2 Padstyle: OX90Y60D30P" at 46.886,-1.676 h1.97 r90; Mechanical 18 "Alt 1 Padstyle: OX60Y90D30P" at 45.362,-1.676 h1.97 r90; Mechanical 18 "Default Padstyle: RX50Y22D0T" at 42.314,-2.083 h1.97 r90; Mechanical 7 "*" at 34.77,11.074 h1.97 r90
VR2: Mechanical 3 "*" at 5.151,7.44 h1.97 r90; Mechanical 18 "0.022in/0.559mm" at 10.155,3.35 h0.98 r90; Mechanical 18 "0.038in/0.952mm" at 5.456,-3.736 h0.98 r90; Mechanical 18 "0.118in/2.997mm" at 5.913,12.494 h0.98 r90; Mechanical 18 "0.118in/2.997mm" at -0.208,4.569 h0.98 r90; Mechanical 18 "0.066in/1.676mm" at 1.697,4.569 h0.98 r90; Mechanical 18 "Alt 2 Padstyle: OX90Y60D30P" at 16.759,-6.2 h1.97 r90; Mechanical 18 "Alt 1 Padstyle: OX60Y90D30P" at 15.235,-6.2 h1.97 r90; Mechanical 18 "Default Padstyle: RX50Y22D0T" at 12.187,-6.607 h1.97 r90; Mechanical 7 "*" at 4.643,6.551 h1.97 r90